# Altium PCB TSI_SAMP_SAMI_V3.4.PcbDoc (part 5 of 5)
Units mm, origin at the board's own origin, x right, y up, seen from the top; angles counter-clockwise.
Board outline 189 x 127.41 mm, 4 copper layers (Top Layer, GROUND, POWER, Bottom Layer), stack 1.56 mm thick; 227 components, 161 nets, 868 pads, 584 vias.
Unrouted connection lines stored in the file: 18.
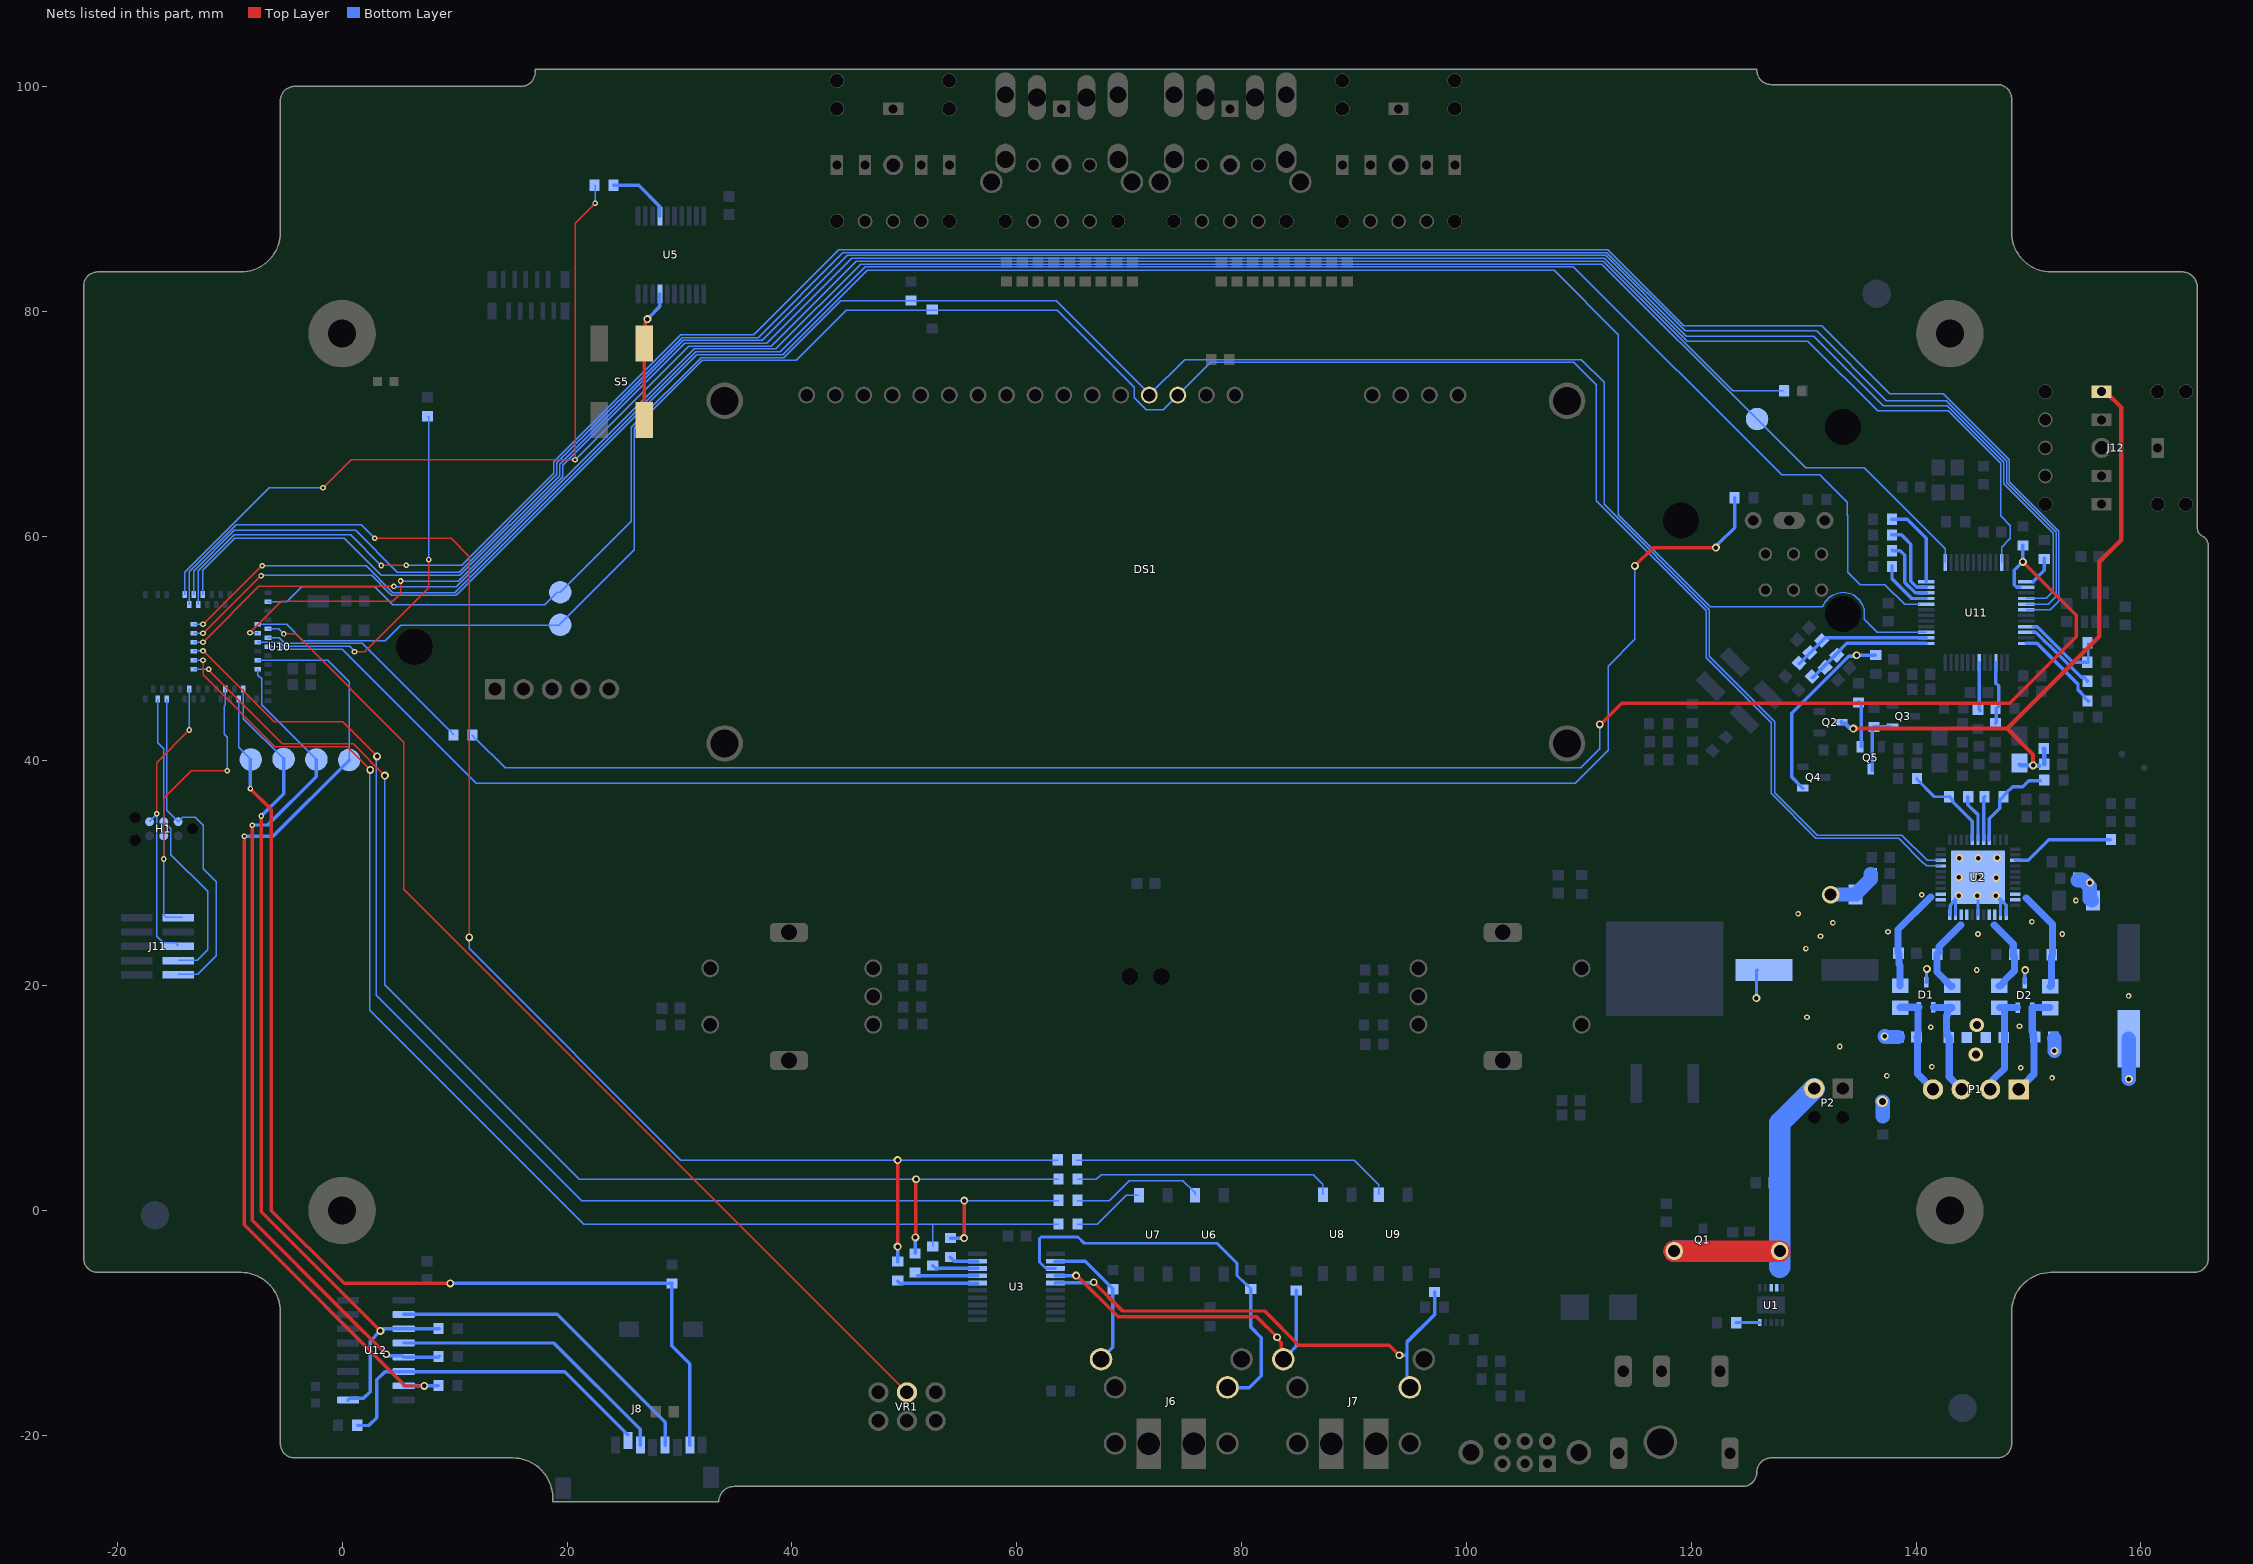
[diagram p5: the nets of this part, all layers, seen from the top]

## Via types
v1: diameter 0.5, hole 0.25, Top Layer to Bottom Layer, tented both sides, 372 vias
v2: diameter 0.7, hole 0.4, Top Layer to Bottom Layer, tented both sides, 201 vias
v3: diameter 1.575, hole 1.067, Top Layer to Bottom Layer, tented both sides, 4 vias
v4: diameter 1.27, hole 0.711, Top Layer to Bottom Layer, tented both sides, 3 vias
v5: diameter 1.016, hole 0.635, Top Layer to Bottom Layer, tented both sides, 2 vias
v6: diameter 0.762, hole 0.381, Top Layer to Bottom Layer, tented both sides, 1 vias
v7: diameter 0.7/0.7 (per signal layer), hole 0.4, Top Layer to Bottom Layer, tented both sides, 1 vias

## Nets (pads, with @x,y where several pads share a name; then routed paths per layer and width w, separated by ;. In a path a pad name is that pad's centre, name@x,y a point inside that pad or via, vN(x,y) a via of type N, cw(c..) or ccw(c..) an arc to the next point about the centre after c; other vN are vias at no path point) (continued)
NetQ3_1: Q3.1 Q5.3 R61.1 | length 5.4
  Bottom Layer w0.305: Q5.3@136.08,39.131 136.08,42.872 136.245,43.037 136.25,43.032 137.706,43.032 Q3.1@137.712,43.027
NetQ4_1: Q4.1 R64.1 | length 16.6
  Bottom Layer w0.305: Q4.1@129.911,37.582 128.93,38.565 128.93,44.255 134,49.325 134.624,49.325 v2(134.7,49.4) ; v2@134.697,49.398 134.703,49.392 R64.1@136.365,49.392
NetQ5_1: Q5.1 R66.1 | length 4.1
  Bottom Layer w0.305: R66.1@134.886,45.247 135.118,45.015 Q5.1@135.118,41.259
NetR4_1: R4.1 U2.25 | length 9.2
  Bottom Layer w0.305: U2.25@148.829,31.151 149.964,31.151 151.804,32.991 R4.1@157.289,32.991
NetR5_1: R5.1 R9.2 U2.19 | length 8.3
  Bottom Layer w0.305: U2.19@146.504,32.976 146.504,34.842 147.441,35.779 147.441,36.516 148.074,37.149 148.074,37.199 148.578,37.703 149.492,37.703 150.034,38.245 R9.2@151.041,38.245
NetR5_2: R5.2 U2.18 | length 3.9
  Bottom Layer w0.305: U2.18@146.004,32.976 146.006,32.978 146.006,36.707 R5.2@146.113,36.814
NetR6_1: R6.1 R10.2 U2.16 | length 8.3
  Bottom Layer w0.254: R10.2@140.055,38.427 140.055,38.377 141.618,36.814 R6.1@142.976,36.814
  Bottom Layer w0.305: R6.1@142.976,36.814 143.274,36.516 143.274,36.376 145.004,34.647 U2.16@145.004,32.976
NetR6_2: R6.2 U2.17 | length 4.2
  Bottom Layer w0.305: R6.2@144.602,36.814 144.602,36.116 145.504,35.214 U2.17@145.504,32.976
NetR7_1: R7.1 U1.10 | length 2.1
  Bottom Layer w0.254: R7.1@123.963,-9.975 123.988,-9.95 U1.10@126.079,-9.95
NetR22_1: R22.1 U6.1 | length 11.9
  Bottom Layer w0.127: R22.1@65.379,0.89 65.396,0.873 68.25,0.873 70.028,2.651 74.788,2.651 75.874,1.565 U6.1@75.874,1.365
NetR23_1: R23.1 U7.1 | length 6.6
  Bottom Layer w0.127: R23.1@65.379,-1.21 67.17,-1.21 69.745,1.365 U7.1@70.874,1.365
NetR24_1: R24.1 U8.1 | length 23.3
  Bottom Layer w0.127: R24.1@65.379,2.79 65.393,2.803 67.094,2.803 67.5,3.21 86.391,3.21 87.236,2.364 U8.1@87.236,1.399
NetR25_1: R25.1 U9.1 | length 28.7
  Bottom Layer w0.127: R25.1@65.316,4.492 90.008,4.492 92.206,2.294 U9.1@92.206,1.399
NetR27_1: R27.1 U5.14 | length 5.7
  Bottom Layer w0.305: R27.1@24.15,91.2 26.376,91.2 28.266,89.31 U5.14@28.266,88.46
NetR39_1: R39.1 U11.9 | length 4.9
  Bottom Layer w0.305: R39.1@137.853,57.35 137.853,56.212 139.618,54.447 U11.9@140.901,54.447
NetR40_1: R40.1 U11.10 | length 6
  Bottom Layer w0.305: R40.1@137.87,58.747 137.915,58.701 138.599,58.701 139,58.3 139,55.87 139.921,54.949 140.899,54.949 U11.10@140.901,54.947
NetR41_1: R41.1 U11.11 | length 6.9
  Bottom Layer w0.305: R41.1@137.85,60.1 138.7,60.1 139.1,59.7 139.541,59.259 139.541,55.976 140.068,55.449 140.899,55.449 U11.11@140.901,55.447
NetR42_1: R42.1 U11.12 | length 7.6
  Bottom Layer w0.305: R42.1@137.85,61.5 139.2,61.5 140.901,59.799 U11.12@140.901,55.947
NetR52_2: R52.2 U11.34 | length 6.7
  Bottom Layer w0.305: U11.34@150.399,51.444 150.65,51.444 152.805,49.289 152.811,49.289 154.677,47.423 154.935,47.423 155.233,47.125 R52.2@155.233,47.075
NetR53_2: R53.2 U11.36 | length 8
  Bottom Layer w0.305: U11.36@149.801,50.447 150.753,50.447 154.4,46.8 154.4,46.319 154.96,45.758 154.96,45.67 155.308,45.323 R53.2@155.346,45.323
NetR54_2: R54.2 R65.1 U11.33 | length 7.9
  Bottom Layer w0.254: R54.2@155.314,48.777 155.314,50.402 R65.1@155.321,50.41
  Bottom Layer w0.305: U11.33@150.399,51.944 150.761,51.944 152.984,49.721 152.99,49.721 153.934,48.777 R54.2@155.314,48.777
NetR55_2: R55.2 U11.25 | length 2.5
  Bottom Layer w0.305: U11.25@150.399,55.949 150.671,56.222 150.671,56.237 151.393,56.958 R55.2@151.393,58.042
NetR57_1: R57.1 U11.42 | length 4.3
  Bottom Layer w0.305: U11.42@145.601,48.747 145.601,44.577 R57.1@145.72,44.459
NetR67_1: R67.1 U3.19 | length 2.6
  Bottom Layer w0.305: R67.1@54.102,-4.139 54.102,-4.15 54.45,-4.498 U3.19@56.522,-4.498
NetR68_1: R68.1 U3.18 | length 4.1
  Bottom Layer w0.305: R68.1@52.54,-4.889 52.799,-5.148 U3.18@56.522,-5.148
NetR69_1: R69.1 U3.17 | length 5.3
  Bottom Layer w0.305: R69.1@51.184,-5.798 U3.17@56.522,-5.798
NetR70_1: R70.1 U3.16 | length 7.2
  Bottom Layer w0.305: R70.1@49.428,-6.285 49.591,-6.448 U3.16@56.522,-6.448
NetR72_1: R72.1 R74.1 U11.26 | length 163
  Top Layer w0.305: v2@111.9,43.231 113.8,45.131 148.331,45.131 154.254,51.054 154.254,52.946 v2(149.5,57.7)
  Bottom Layer w0.127: R72.1@11.557,42.313 11.557,42.263 11.854,41.965 11.904,41.965 14.487,39.383 110.185,39.383 111.861,41.059 v2(111.861,43.241)
  Bottom Layer w0.305: U11.26@149.204,55.449 148.968,55.449 148.746,55.67 148.746,56.946 v2(149.5,57.7) 149.5,59.194 R74.1@149.501,59.195
OUTL+: C8.1 FB2.2 U2.2 U2.3 | length 9.2
  Bottom Layer w0.635: FB2.2@138.582,19.984 FB2.2@138.582,20.014 138.582,21.802 138.486,21.899 138.486,22.809 138.396,22.899 138.396,24.996 141.3,27.9
OUTL-: C7.1 FB1.2 U2.41 U2.42 | length 6.9
  Bottom Layer w0.635: FB1.2@143.205,19.958 143.105,19.958 141.85,21.213 141.85,22.793 141.859,22.793 142.042,22.975 142.042,23.467 143.975,25.4
OUTR+: C5.2 FB4.2 U2.31 U2.32 | length 8.9
  Bottom Layer w0.635: 149.8,27.8 152.136,25.464 152.136,22.76 152.033,22.657 152.033,20.025 FB4.2@151.93,19.923
OUTR-: C6.2 FB3.2 U2.36 U2.37 | length 6.8
  Bottom Layer w0.635: 146.95,25.4 148.2,24.15 148.636,23.714 148.636,22.691 148.742,22.585 148.742,21.337 147.814,20.408 147.814,20.318 147.486,19.991 FB3.2@147.396,19.991
PGND: C1.1 C2.2 C3.1 C4.2 C13.1 C14.1 C16.1 C17.1 C19.2 C22.2 D1.3 D2.3 F3.1 U2.0 U2.34 U2.35 U2.39 U2.43 U2.44 | length 28.2
  Bottom Layer w0.305: v2(125.8,18.9) 125.8,21.325 C22.2@125.875,21.4 ; D1.3@140.893,20.299 140.925,20.331 140.925,21.466 v2(140.957,21.498) ; U2.44@143.004,26.326 143.027,26.349 143.027,27.174 U2.0@143.504,27.651 ; U2.43@143.504,26.326 U2.0@143.504,27.651 ; v2(143.789,28.025) 143.504,27.74 U2.0@143.504,27.651 ; v2(145.44,28.013) 145.504,27.949 U2.39@145.504,26.326 ; U2.35@147.504,26.326 147.504,27.626 v2(147.104,28.025) 147.129,28.025 148.004,27.151 U2.34@148.004,26.326 ; D2.3@149.682,20.251 149.682,21.157 149.682,21.36 v2(149.708,21.386)
  Bottom Layer w1.27: v3(132.4,28.1) 132.413,28.113 134.692,28.113 C17.1@134.706,28.127 ; C17.1@134.706,28.227 135.967,29.488 C13.1@135.967,29.905 ; v5(137,9.7) 137.024,9.676 F3.1@137.024,8.391 ; v2(137.2,15.5) 137.26,15.44 C4.2@138.392,15.44 ; C1.1@152.296,15.276 152.3,15.273 v2(152.3,14.2) ; C14.1@154.38,29.384 154.872,29.384 155.451,28.805 155.451,27.746 C16.1@155.616,27.581 ; C19.2@158.9,15.275 158.925,15.25 v2(158.925,11.7)
  other v1: 152.1,11.8 137.4,12 149.3,12.7 141.4,12.8 133.2,14.6 141.3,16.3 149.2,16.4 130.3,17.2 158.9,19.1 145.4,21.4 130.2,23.3 131.5,24.4 145.5,24.6 153,24.6 137.5,24.8 132.6,25.6 150.3,25.7 129.5,26.4 154.216,27.581 140.5,28.1
  other v2: 155.46,29.168 147.129,29.587 143.802,29.638 145.504,29.651 143.853,31.353 145.529,31.353 147.205,31.365
  other v4: 145.313,13.879 145.4,16.5
PWR_LED: R14.2 U10.23 | length 33.2
  Top Layer w0.127: v1(1.1,49.7) 2,49.7 7.7,55.4 v1(7.7,57.9)
  Bottom Layer w0.127: U10.23@-7.5,50.55 -5.563,50.55 -5.205,50.192 0.657,50.192 1.1,49.749 v1(1.1,49.7) ; R14.2@7.6,70.65 7.7,70.55 v1(7.7,57.9)
R_LED_DOME: R73.1 U10.24 | length 155.9
  Top Layer w0.305: v2(114.985,57.349) 116.606,58.971 v2(122.2,58.971)
  Bottom Layer w0.127: U10.24@-6.6,50.15 -5.522,50.15 -5.31,49.938 -0.013,49.938 11.925,38 109.695,38 112.623,40.929 112.623,48.436 114.985,50.797 v2(114.985,57.349)
  Bottom Layer w0.305: v2(122.2,58.971) 122.2,59.078 122.398,59.275 122.398,59.298 123.85,60.75 R73.1@123.85,63.4
REC_LED: R15.2 R27.2 U10.4 | length 185.6
  Top Layer w0.127: v1(-1.7,64.3) 0.789,66.789 v1(20.711,66.789) ; v1@20.723,66.789 20.723,87.823 v1(22.5,89.6)
  Bottom Layer w0.127: U10.4@-14,54.8 -14,56.796 -6.496,64.3 v1(-1.7,64.3) ; v1(20.711,66.789) 30.819,76.897 38.169,76.897 45.723,84.451 112.164,84.451 123.695,72.92 R15.2@128.195,72.92 ; R27.2@22.45,91.2 22.5,91.15 v1(22.5,89.6)
RESET: H1.3 J11.10 U10.40 | length 28.3
  Top Layer w0.127: v1(-15.873,31.275) -15.875,31.277 -15.875,36.675 -13.425,39.125 v1(-10.225,39.125)
  Bottom Layer w0.127: v1(-15.873,31.275) -15.867,31.283 -15.867,33.316 H1.3@-15.86,33.324 ; v1(-15.873,31.275) -15.875,31.273 -15.875,26.306 -15.665,26.096 J11.10@-14.175,26.096 ; U10.40@-10.4,46.4 -10.4,44.969 -10.481,44.888 -10.481,42.365 -10.225,42.109 v1(-10.225,39.125)
RIGHT: R13.1 R63.2 U11.39 | length 5.4
  Bottom Layer w0.305: R63.2@147.066,43.329 147.117,43.38 R13.1@147.117,44.688 ; U11.39@147.101,48.747 147.101,46.913 147.341,46.673 R13.1@147.341,44.84
RIGHT_S: C32.2 C65.1 J12.3 Q2.3 R37.1 | length 57.6
  Top Layer w0.381: v2(134.425,42.875) 148.1,42.875 ; v2(150.4,39.6) 150.4,40.575 148.1,42.875 ; J12.3@156.493,72.84 156.843,72.84 158.255,71.428 158.255,59.674 156.291,57.711 156.291,51.066 148.1,42.875
  Bottom Layer w0.381: Q2.3@133.36,43.434 133.469,43.325 133.694,43.325 134.083,42.936 134.364,42.936 v2(134.425,42.875) ; C32.2@149.19,39.682 149.271,39.6 v2(150.4,39.6) ; v2@150.318,39.579 C65.1@150.966,39.579 ; R37.1@151.35,41.1 151.4,41.05 C65.1@151.4,39.7
SAMP_DB_1: J6.2A R16.1 U3.2 | length 13
  Bottom Layer w0.254: U3.2@63.359,-4.581 U3.2@63.442,-4.498
  Bottom Layer w0.305: U3.2@63.442,-4.498 66.102,-4.498 68.554,-6.95 R16.1@68.554,-7 68.554,-12.167 J6.2A@67.499,-13.222
SAMP_DB_2: J6.2B R17.1 U3.3 | length 36.7
  Bottom Layer w0.254: U3.3@63.442,-5.148 62.592,-5.148 62.027,-4.582 62.027,-2.502 62.175,-2.353 65.379,-2.353 65.456,-2.353 66.002,-2.899 77.83,-2.899 79.608,-4.678 79.608,-5.774 80.387,-6.552 80.437,-6.552 80.81,-6.925 R17.1@80.81,-6.975
  Bottom Layer w0.305: J6.2B@78.749,-15.722 78.778,-15.752 80.683,-15.752 81.762,-14.672 81.762,-11.307 80.81,-10.354 R17.1@80.81,-6.975
SAMP_DB_3: J7.2A R18.1 U3.4 | length 30.8
  Top Layer w0.305: v2(65.275,-5.775) 65.352,-5.775 69.014,-9.437 81.328,-9.437 v2(83.159,-11.268) 83.159,-11.375 83.549,-11.765 83.549,-13.055 J7.2A@83.717,-13.222
  Bottom Layer w0.305: U3.4@63.442,-5.798 63.453,-5.786 65.264,-5.786 v2(65.275,-5.775) ; J7.2A@83.717,-13.222 84.861,-12.078 R18.1@84.861,-7.065
SAMP_DB_4: J7.2B R19.1 U3.5 | length 43.6
  Top Layer w0.305: v2(66.85,-6.375) 69.407,-8.932 82.054,-8.932 85.09,-11.967 93.14,-11.967 v2(94.042,-12.869)
  Bottom Layer w0.305: U3.5@63.442,-6.448 63.478,-6.411 66.814,-6.411 v2(66.85,-6.375) ; v2(94.042,-12.869) 94.71,-12.869 94.716,-12.875 ; J7.2B@94.967,-15.722 94.716,-15.472 94.716,-12.875 ; R19.1@97.167,-7.217 97.167,-9.24 94.716,-11.691 94.716,-12.875
SCL: DS1.8 R20.2 T7.1 U2.9 U10.16 | length 201.9
  Bottom Layer w0.127: U10.16@-6.6,54.15 -4.95,54.15 -3.6,55.5 2.9,55.5 4.501,53.899 18.008,53.899 19.11,55 T7.1@19.4,55 25.73,61.33 25.73,69.677 31.933,75.881 39.29,75.881 44.359,80.95 R20.2@50.6,80.95 63.496,80.95 DS1.8@71.85,72.596 ; DS1.8@71.793,72.539 DS1.8@71.85,72.596 ; U2.9@142.179,31.151 140.985,31.151 138.736,33.4 131.2,33.4 127.419,37.181 127.419,43.481 121.6,49.3 121.6,53.459 112.242,62.817 112.242,73.681 110.223,75.7 74.954,75.7 DS1.8@71.85,72.596
SD_CLK: J8.5 U12.2 | length 29.3
  Bottom Layer w0.305: U12.2@5.472,-9.236 19.136,-9.236 28.725,-18.825 J8.5@28.725,-20.863
SD_CS: J8.2 R58.2 U12.6 | length 30.3
  Bottom Layer w0.305: R58.2@1.397,-19.092 1.422,-19.117 2.375,-19.117 3.073,-18.419 3.073,-15.053 3.81,-14.316 U12.6@5.472,-14.316 19.79,-14.316 25.177,-19.704 J8.2@25.425,-19.951
SD_MOSI: J8.3 U12.4 | length 25.6
  Bottom Layer w0.305: U12.4@5.472,-11.776 18.838,-11.776 26.525,-19.464 J8.3@26.525,-20.863
SDA: DS1.7 R21.2 T8.1 U2.8 U10.19 | length 205.5
  Bottom Layer w0.127: U10.19@-7.5,52.15 -4.95,52.15 -3.5,50.7 3.825,50.7 5.2,52.075 19.275,52.075 25.984,58.784 25.984,69.572 32.039,75.627 40.386,75.627 44.86,80.1 63.6,80.1 70.475,73.225 70.475,72.3 71.525,71.25 73.044,71.25 77.24,75.446 109.551,75.446 111.557,73.441 111.557,63.143 121.346,53.354 121.346,49.154 127.1,43.4 127.1,37.1 131.064,33.136 138.436,33.136 140.612,30.961 140.619,30.961 140.928,30.651 U2.8@142.179,30.651
SDC_SPI_MCS: R43.2 T10.1 U10.27 U12.7 | length 87.7
  Top Layer w0.305: v1(-8.7,33.3) -8.718,33.282 -8.718,-1.266 5.615,-15.6 v2(7.3,-15.6)
  Bottom Layer w0.127: U10.27@-7.5,48.95 -1.275,48.95 0.625,47.05 T10.1@0.625,40.075
  Bottom Layer w0.305: v1(-8.7,33.3) -6.15,33.3 T10.1@0.625,40.075 ; U12.7@5.472,-15.586 5.479,-15.593 7.293,-15.593 v2(7.3,-15.6) ; v2@7.286,-15.586 R43.2@8.56,-15.586
SDC_SPI_MISO: J8.7 R49.2 T13.1 U10.37 | length 100.1
  Top Layer w0.305: v1(-8.163,37.537) -6.3,35.675 -6.3,0 0.181,-6.481 v2(9.614,-6.481)
  Bottom Layer w0.127: U10.37@-9.2,45.5 -9.2,41.2 T13.1@-8.125,40.125
  Bottom Layer w0.305: v1(-8.163,37.537) -8.163,40.087 T13.1@-8.125,40.125 ; v2(9.614,-6.481) 9.626,-6.468 R49.2@29.337,-6.468 ; R49.2@29.349,-6.455 R49.2@29.337,-6.468 ; J8.7@30.925,-20.863 30.925,-13.628 29.324,-12.027 29.324,-6.481 R49.2@29.337,-6.468
SDC_SPI_MOSI: R48.2 T11.1 U10.29 U12.5 | length 76
  Top Layer w0.305: v1(-8,34.279) -8,-0.861 0.252,-9.114 v2(3.918,-12.78)
  Bottom Layer w0.127: U10.29@-7.5,48.15 -7.5,47.632 -7.163,47.295 -7.163,44.996 T11.1@-2.292,40.125
  Bottom Layer w0.305: v1(-8,34.279) -7.984,34.294 -6.606,34.294 -2.292,38.608 T11.1@-2.292,40.125 ; v2(3.918,-12.78) 4.025,-12.78 4.144,-12.899 5.324,-12.899 U12.5@5.472,-13.046 8.547,-13.046 R48.2@8.623,-12.97
SDC_SPI_SCK: R50.2 T12.1 U10.36 U12.3 U12.9 | length 77.2
  Top Layer w0.305: v1(-7.2,35.1) -7.2,-0.1 v2(3.4,-10.7)
  Bottom Layer w0.127: U10.36@-8.8,46.4 -8.8,43.768 T12.1@-5.208,40.176
  Bottom Layer w0.305: v1(-7.2,35.1) -5.208,37.092 T12.1@-5.208,40.176 ; U12.9@0.522,-16.856 0.669,-16.709 1.9,-16.709 2.489,-16.12 2.489,-11.611 v2(3.4,-10.7) 3.507,-10.7 3.7,-10.506 U12.3@5.472,-10.506 8.61,-10.506 R50.2@8.623,-10.494
"SPEAKER_LEFT +": C4.1 D1.2 FB2.1 P1.4 | length 9.6
  Bottom Layer w0.635: FB2.1@138.582,18.084 138.59,18.091 140.236,18.091 D1.2@140.243,18.099 140.168,18.023 140.168,15.515 140.092,15.44 140.112,15.42 140.112,12.17 P1.4@141.503,10.779
"SPEAKER_LEFT -": C3.2 D1.1 FB1.1 P1.3 | length 11.2
  Bottom Layer w0.635: D1.1@141.543,18.059 D1.1@141.543,18.099 141.579,18.064 142.915,18.064 FB1.1@142.95,18.099 ; D1.1@141.564,18.079 143.185,18.079 FB1.1@143.205,18.058 ; C3.2@142.95,15.375 142.95,11.872 P1.3@144.043,10.779 ; C3.2@142.95,15.4 142.792,15.557 142.792,15.862 142.7,15.954 142.7,17.329 142.787,17.416 142.787,17.701 143.115,18.028 FB1.1@143.205,18.028
"SPEAKER_RIGHT +": C1.2 D2.1 FB4.1 P1.1 | length 9.5
  Bottom Layer w0.635: P1.1@149.123,10.779 149.706,11.361 150.471,12.127 150.471,15.382 150.414,15.44 150.414,15.862 150.332,15.944 D2.1@150.332,18.051 FB4.1@151.902,18.051
"SPEAKER_RIGHT -": C2.1 D2.2 FB3.1 P1.2 | length 9.4
  Bottom Layer w0.635: P1.2@146.583,10.779 146.806,11.002 146.806,11.606 147.85,12.65 147.85,15.4 FB3.1@147.85,18.056 ; FB3.1@147.401,18.056 FB3.1@148.008,18.056 ; FB3.1@148.008,18.051 D2.2@149.032,18.051
SWCLK: H1.4 J11.4 U10.53 | length 27.1
  Bottom Layer w0.127: U10.53@-16.4,45.5 -16.4,41.625 -15.86,41.085 H1.4@-15.86,34.594 -15.225,33.959 -15.225,31.65 -11.975,28.4 -11.975,23.2 -12.889,22.286 J11.4@-14.575,22.286
SWDIO: H1.2 J11.2 U10.51 | length 30.1
  Bottom Layer w0.127: U10.51@-15.6,45.5 -15.6,35.604 H1.2@-14.59,34.594 -14.581,34.594 -14.2,34.975 -13.075,34.975 -12.375,34.275 -12.375,30.405 -11.199,29.229 -11.199,22.66 -12.839,21.02 J11.2@-14.575,21.02
SWO: H1.6 J11.6 U10.47 | length 26.4
  Top Layer w0.127: v1(-16.5,35.3) -16.5,39.85 v1(-13.6,42.75)
  Bottom Layer w0.127: H1.6@-17.13,34.594 -17.13,34.632 -16.538,35.224 v1@-16.5,35.224 ; v1(-16.5,35.3) v1@-16.5,35.224 ; J11.6@-14.575,23.56 -14.837,23.822 -15.922,23.822 -16.5,24.4 v1@-16.5,35.224 ; v1(-13.6,42.75) U10.47@-13.6,46.4
TRIG_1: R22.2 R67.2 U10.59 | length 114.3
  Top Layer w0.127: v1(-12.375,49.785) -6.05,43.46 0.04,43.46 v2(3.1,40.4)
  Top Layer w0.305: v2(55.325,-2.45) 55.328,-2.447 55.328,0.887 v2(55.33,0.89)
  Bottom Layer w0.127: U10.59@-13.2,49.75 -13.165,49.785 v1(-12.375,49.785) ; v2(3.1,40.4) 3.041,40.341 3.041,19.159 21.31,0.89 v2(55.33,0.89) R22.2@63.754,0.89
  Bottom Layer w0.305: R67.2@54.102,-2.439 54.113,-2.45 v2(55.325,-2.45)
TRIG_2: R23.2 R68.2 U10.60 | length 113.1
  Top Layer w0.127: v1(-12.375,48.95) -12.375,47.657 -5.98,41.262 0.438,41.262 v2(2.5,39.2)
  Bottom Layer w0.127: U10.60@-13.2,48.95 v1(-12.375,48.95) ; v2(2.5,39.2) 2.475,39.175 2.475,17.825 21.51,-1.21 52.47,-1.21 ; R68.2@52.54,-3.189 52.54,-1.28 52.47,-1.21 ; R23.2@63.754,-1.21 52.47,-1.21
TRIG_3: R24.2 R69.2 U10.61 | length 113.3
  Top Layer w0.127: v1(-11.875,48.15) -11.875,48.065 -5.326,41.516 0.984,41.516 v2(3.8,38.7)
  Top Layer w0.305: v2(50.99,-2.388) 51.018,-2.36 51.018,2.762 v2(51.046,2.79)
  Bottom Layer w0.127: U10.61@-13.2,48.15 v1(-11.875,48.15) ; v2(3.8,38.7) 3.8,20.1 21.11,2.79 v2(51.046,2.79) R24.2@63.754,2.79
  Bottom Layer w0.305: R69.2@50.952,-3.811 50.99,-3.773 v2(50.99,-2.388)
TRIG_4: R25.2 R70.2 U10.5 | length 134.9
  Top Layer w0.127: v1(2.9,59.796) 2.904,59.8 9.7,59.8 11.325,58.175 11.325,24.325 v2(11.3,24.3)
  Top Layer w0.305: v2(49.403,-3.2) v2(49.403,-3.2) 49.404,4.491 v2(49.405,4.492)
  Bottom Layer w0.127: U10.5@-13.6,53.9 -13.6,56.837 -9.437,61 1.7,61 2.9,59.8 v1(2.9,59.796) ; v2(11.3,24.3) 11.3,23.318 30.126,4.492 v2(49.405,4.492) R25.2@63.69,4.492
  Bottom Layer w0.305: v2(49.403,-3.2) 49.403,-4.509 R70.2@49.428,-4.535
"UI LOCK": S5.1 U5.7 | length 11.6
  Top Layer w0.305: S5.1@26.877,70.541 26.877,76.941 26.945,77.01 26.945,78.987 27.153,79.194 v2(27.153,79.301)
  Bottom Layer w0.305: v2(27.153,79.301) 28.266,80.414 U5.7@28.266,81.54
V_CTRL: U10.20 VR1.2 | length 92.6
  Top Layer w0.127: v1(-5.2,51.3) -4.15,51.3 5.5,41.65 5.5,28.57 VR1.2@50.241,-16.171
  Bottom Layer w0.127: U10.20@-6.6,51.75 -6.59,51.74 -5.64,51.74 v1(-5.2,51.3)
VBAT: C30.2 P2.2 Q1.2 U1.3 U1.4 | length 28.2
  Top Layer w1.905: v3(118.479,-3.6) v3(127.879,-3.6)
  Bottom Layer w1.905: v3(118.479,-3.6) Q1.2@120.079,-3.6 ; 127.879,-5.049 127.879,2.475 127.879,7.798 P2.2@130.937,10.855
VS_MICN: C50.2 C51.2 R51.1 U11.2 | length 12.2
  Bottom Layer w0.305: R51.1@129.608,48.639 C51.2@130.622,49.653 ; C51.2@130.622,49.654 131.646,50.678 131.915,50.947 U11.2@140.901,50.947
VS_MICP: C47.2 C52.2 R56.1 U11.1 | length 11.4
  Bottom Layer w0.305: R56.1@130.749,47.444 130.84,47.444 131.809,48.414 132.872,49.477 133.842,50.447 U11.1@140.901,50.447
VS_RX: R72.2 U10.22 | length 20.1
  Bottom Layer w0.127: U10.22@-6.6,50.95 -5.603,50.95 -5.099,50.446 1.798,50.446 9.495,42.749 9.507,42.749 9.931,42.326 R72.2@9.931,42.313
VS_SPI_DCS: T4.1 U10.58 U11.13 | length 181.5
  Top Layer w0.127: v1(-12.375,50.55) -7.401,55.524 v1@4.595,55.524
  Bottom Layer w0.127: U10.58@-13.2,50.55 v1(-12.375,50.55) ; v1(4.597,55.524) 4.648,55.474 10.155,55.474 31.324,76.643 38.561,76.643 46.116,84.197 112.059,84.197 125.85,70.405 130.167,66.088 135.397,66.088 142.601,58.884 U11.13@142.601,57.647
VS_SPI_DREQ: U10.56 U11.8 | length 184.7
  Top Layer w0.127: v1(-12.375,52.15) -12.345,52.15 -7.142,57.353 v1(-7.112,57.353)
  Bottom Layer w0.127: U10.56@-13.2,52.15 v1(-12.375,52.15) ; v1(-7.112,57.353) 2.124,57.353 4.512,54.966 10.006,54.966 31.429,76.389 38.954,76.389 46.508,83.943 109.524,83.943 128.036,65.43 131.445,65.43 133.858,63.017 133.858,61.836 133.903,61.792 133.903,56.797 134.6,56.1 135.012,55.688 137.23,55.688 138.97,53.947 U11.8@140.304,53.947
VS_SPI_MCS: U10.21 U11.23 | length 188.6
  Top Layer w0.127: v1(-8.2,51.4) -5.422,54.178 4.496,54.178 5.2,54.882 v1(5.2,56)
  Bottom Layer w0.127: v1(-8.2,51.4) -7.55,51.4 U10.21@-7.5,51.35 ; v1(5.2,56) 10.322,56 19.6,65.278 19.6,66.3 30.451,77.151 37.776,77.151 45.331,84.705 112.269,84.705 119.647,77.327 130.378,77.327 136.576,71.129 142.871,71.129 147.538,66.462 147.538,61.789 148.391,60.936 148.391,59.783 148.213,59.605 147.601,58.993 U11.23@147.601,57.647
VS_SPI_MISO: U10.7 U11.30 | length 204.2
  Top Layer w0.127: v1(3.48,57.379) 3.49,57.389 5.689,57.389 v1(5.7,57.4)
  Bottom Layer w0.127: U10.7@-12.8,53.9 -12.8,56.918 -9.618,60.1 0.758,60.1 v1(3.48,57.379) ; v1(5.7,57.4) 10.645,57.4 18.838,65.593 18.838,66.616 30.135,77.913 36.598,77.913 44.153,85.467 112.585,85.467 119.353,78.698 131.623,78.698 137.668,72.653 142.425,72.653 148.3,66.778 148.3,64.844 152.709,60.435 152.709,54.205 151.951,53.447 U11.30@149.801,53.447
VS_SPI_MOSI: U10.6 U11.29 | length 203.2
  Bottom Layer w0.127: U10.6@-13.2,54.8 -13.2,56.878 -9.578,60.5 1.2,60.5 4.9,56.8 10.404,56.8 19.092,65.488 19.092,66.51 30.24,77.659 36.991,77.659 44.545,85.213 112.48,85.213 119.451,78.241 131.153,78.241 137.35,72.044 142.675,72.044 148.046,66.672 148.046,64.739 152.455,60.329 152.455,54.659 151.743,53.947 U11.29@149.801,53.947
VS_SPI_SCK: U10.8 U11.28 | length 200.9
  Bottom Layer w0.127: U10.8@-12.4,54.8 -12.4,56.959 -9.559,59.8 0.2,59.8 3.484,56.516 10.479,56.516 19.346,65.383 19.346,66.405 30.345,77.405 37.383,77.405 44.938,84.959 112.374,84.959 119.549,77.784 130.873,77.784 137.071,71.586 142.773,71.586 147.792,66.567 147.792,64.634 152.197,60.228 152.197,55.072 151.574,54.449 149.804,54.449 U11.28@149.801,54.447
VS_SPI_xRESET: U10.57 U11.3 | length 193.3
  Top Layer w0.127: v1(-12.375,51.35) -12.351,51.35 -7.237,56.464 v1(-7.214,56.464)
  Bottom Layer w0.127: U10.57@-13.2,51.35 v1(-12.375,51.35) ; v1(-7.214,56.464) -7.178,56.5 2.618,56.5 4.153,54.966 4.407,54.712 10.112,54.712 10.366,54.966 31.535,76.135 39.185,76.135 46.7,83.65 107.799,83.65 113.525,77.924 113.525,61.893 121.71,53.708 131.502,53.708 131.527,53.708 131.552,53.713 ccw(c131.502,54.013) 131.777,53.883 cw(c133.502,53.074) 135.381,52.761 135.381,52.736 135.381,52.61 136.544,51.447 U11.3@140.901,51.447
pads on no net: DS1.0 DS1.1 DS1.2 DS1.4 DS1.9 DS1.10 DS1.11 DS1.12 DS1.13 DS1.14 DS1.15 DS1.16 DS1.17 DS1.18 DS1.19 DS1.20 H1. J1.0 J1.3 J2.0 J2.4 J2.5 J2.6 J2.10 J2.11 J3.0 J3.4 J3.5 J3.6 J3.10 J3.11 J4.0 J4.4 J4.5 J4.6 J4.10 J4.11 J5.0 J5.4 J5.5 J5.6 J5.10 J5.11 J6.0 J7.0 J8.1 J8.8 J8.CD1 J8.CD2 J9.MP1 J9.MP2 J9.MP3 J9.MP4 J11.7 J11.8 J11.9 J12.0 J12.6 J12.10 J12.11 M1. P2.0 S1.1 S1.2 S1.3 S1.4 S1.7 S1.8 S2.1 S2.4 S2.5 S2.6 S3.0 S4.0 U1.5 U1.6 U1.7 U2.23 U2.26 U3.8 U3.9 U3.11 U3.12 U3.13 U5.8 U5.9 U5.11 U5.12 U5.13 U10.0 U10.31 U10.32 U10.34 U10.35 U11.15 U11.27 U12.12 U12.13 U12.15 U12.16 VR1.4 VR1.5 VR1.6

## Polygon pours and split planes (outlines as drawn)
GND on Bottom Layer "GND_L04_P011" (solid, remove dead copper, pour order 11): -21.731,-5.75 -9,-5.75 cw(c-9,-9) -5.75,-8.998 -5.75,-20.73 ccw(c-4.23,-20.73) -4.23,-22.25 15.4,-22.25 cw(c15.4,-25.406) 18.555,-25.406 18.555,-26.187 33.767,-26.187 cw(c35.164,-26.187) 35.164,-24.79 36.71,-24.79 124.561,-24.79 ccw(c124.561,-23.27) 126.082,-23.27 cw(c127.1,-23.269) 127.099,-22.25 147.23,-22.25 ccw(c147.23,-20.73) 148.75,-20.73 148.75,-9 cw(c152,-9) 152,-5.75 164.73,-5.75 ccw(c164.73,-4.23) 166.25,-4.23 166.25,58.271 ccw(c164.025,58.273) 165.446,59.986 cw(c165.809,60.424) 165.24,60.42 165.136,83.75 152,83.75 cw(c152,87) 148.75,87 148.75,98.891 ccw(c147.231,98.892) 147.23,100.412 127.101,100.412 cw(c127.101,101.431) 126.082,101.431 126.08,101.457 126.08,101.75 ccw(c125.831,101.751) 125.83,102 17.17,102 ccw(c17.169,101.751) 16.92,101.743 16.92,101.27 cw(c15.9,101.27) 15.9,100.25 -4.23,100.25 ccw(c-4.231,98.731) -5.75,98.73 -5.75,87 cw(c-8.999,86.999) -9,83.75 -21.73,83.75 ccw(c-21.731,82.231) -23.25,82.23 -23.25,-4.23 ccw(c-21.731,-4.231)
PGND on Bottom Layer "PGND_L04_P010" (solid, pour order 10): 147.894,32.041 148.021,29.805 149.304,29.805 152.333,30.054 154.883,30.054 161.8,26 161.8,10.958 153.958,10.958 151.1,8.1 135.8,8.1 135.8,10.6 127.6,18.8 123.9,18.8 123.9,24.3 130.252,30.652 143.114,30.652 143.114,32.041
GND on Top Layer "GND_L01_P008" (solid, remove dead copper, pour order 8): -21.73,-5.5 -9,-5.5 cw(c-9,-9) -5.5,-9 -5.5,-20.73 ccw(c-4.23,-20.73) -4.23,-22 14.648,-22 15.168,-22 cw(c15.168,-25.557) 18.725,-25.557 18.725,-25.913 33.493,-25.913 cw(c34.866,-25.913) 34.867,-24.54 35.201,-24.54 36.496,-24.54 37.516,-24.54 124.561,-24.54 ccw(c124.561,-23.27) 125.831,-23.27 cw(c127.1,-23.269) 127.1,-22 147.23,-22 ccw(c147.23,-20.73) 148.5,-20.73 148.5,-9 cw(c152,-9) 152,-5.5 164.73,-5.5 ccw(c164.73,-4.23) 166,-4.23 166,59.115 ccw(c165.204,59.209) 165.717,59.825 165.37,60.053 cw(c165.806,60.719) 165.009,60.709 165.019,82.23 ccw(c163.687,82.168) 163.624,83.5 152,83.5 cw(c152,87) 148.5,87 148.5,98.891 ccw(c147.23,98.892) 147.23,100.161 127.101,100.161 cw(c127.101,101.431) 125.831,101.431 ccw(c124.642,101.351) 124.561,102.54 18.44,102.54 ccw(c18.439,101.271) 17.17,101.27 cw(c15.901,101.269) 15.9,100 -4.23,100 ccw(c-4.231,98.731) -5.5,98.73 -5.5,87 cw(c-9,87) -9,83.5 -21.73,83.5 ccw(c-21.731,82.231) -23,82.23 -23,-4.23 ccw(c-21.73,-4.23)
3V3_LDO on POWER (split plane): 534 vertices, not listed, extent -22.49,-25.403 165.49,100.99
AVDD on POWER (split plane): 135.295,51.099 135.337,51.07 135.386,51.061 142.01,51.061 142.021,51.053 142.061,51.046 142.061,50.022 142.071,49.972 142.099,49.93 142.141,49.902 142.19,49.892 152.118,49.892 152.118,39.547 152.118,39.401 152.118,37.616 134.935,37.616 134.885,37.606 134.843,37.578 132.392,35.127 112.753,35.127 112.753,39.379 112.753,46.958 119.066,53.271 133.122,53.271
3V3 on POWER (split plane): 149.514,58.804 149.524,58.754 149.552,58.712 149.594,58.684 149.644,58.674 155.318,58.674 155.318,50.022 155.318,39.53 152.377,39.53 152.377,39.547 152.377,50.022 152.367,50.071 152.339,50.113 152.297,50.141 152.247,50.151 142.32,50.151 142.32,51.173 142.31,51.223 142.282,51.265 142.24,51.293 142.19,51.303 142.148,51.303 142.137,51.31 142.087,51.32 135.44,51.32 133.359,53.401 137.56,57.602 139.56,57.602 139.61,57.612 139.652,57.64 139.68,57.682 139.689,57.731 139.689,67.292 149.514,67.292
GND on GROUND (split plane): 571 vertices, not listed, extent -22.49,-25.403 165.49,100.99
PGND on GROUND (split plane): 147.914,29.41 147.924,29.361 147.952,29.319 147.994,29.291 148.044,29.281 151.828,29.281 151.878,29.291 151.92,29.319 151.948,29.361 151.958,29.41 151.958,30.123 165.49,30.123 165.49,7.759 135.232,7.759 135.232,14.246 135.222,14.295 135.194,14.337 135.152,14.365 135.103,14.375 128.539,14.375 125.229,17.685 125.229,29.37 142.964,29.37 143.013,29.38 143.055,29.408 143.083,29.45 143.093,29.499 143.093,32.061 147.914,32.061
AGND on GROUND (split plane): 158.043,70.958 158.085,70.93 158.134,70.921 162.596,70.921 162.596,65.508 155.629,58.542 155.601,58.5 155.591,58.45 155.591,55.416 155.591,41.623 151.585,37.616 134.935,37.616 134.885,37.606 134.843,37.578 132.392,35.127 112.753,35.127 112.753,39.379 112.753,46.958 118.637,52.842 130.275,52.842 132.908,50.208 132.95,50.18 133,50.171 148.5,50.171 148.55,50.18 148.592,50.208 150.053,51.67 150.081,51.712 150.091,51.761 150.091,72.041 156.96,72.041

## Keep-outs
Keep-Out Layer:
  lines w0.1: 70.102,10.728 ccw(c70.356,10.728) 70.356,10.474 72.646,10.474 ccw(c72.646,10.728) 72.9,10.728 72.9,26.446 ccw(c72.646,26.446) 72.646,26.7 70.356,26.7 ccw(c70.356,26.446) 70.102,26.446 70.102,10.728
  lines w0.254: 125.83,101.5 125.83,101.431 125.831,101.431 ccw(c127.101,101.431) 127.101,100.161 147.23,100.161 cw(c147.23,98.891) 148.5,98.891 148.5,87 ccw(c152,87) 152,83.5 163.624,83.5 163.792,83.5 cw(c163.792,82.23) 165.062,82.23 165.062,75.022 165.062,60.818 165.062,60.795 ccw(c166.112,60.795) 165.37,60.052 165.783,59.639 cw(c165.259,59.115) 166,59.115 166,58.553 ; 125.831,101.5 125.827,101.5 124.561,101.5 18.44,101.5 17.17,101.5 17.17,101.27 cw(c15.9,101.27) 15.9,100 -4.23,100 ccw(c-4.23,98.73) -5.5,98.73 -5.5,87 cw(c-9,87) -9,83.5 -21.73,83.5 ccw(c-21.73,82.23) -23,82.23 -23,-4.23 ccw(c-21.73,-4.23) -21.73,-5.5 -9,-5.5 cw(c-9,-9) -5.5,-9 -5.5,-20.73 ccw(c-4.23,-20.73) -4.23,-22 14.393,-22 15.35,-22 cw(c15.35,-25.319) 18.669,-25.319 18.669,-25.375 18.669,-26.073 33.493,-26.073 33.493,-25.81 cw(c34.763,-25.81) 34.763,-24.54 36.382,-24.54 124.561,-24.54 ccw(c124.561,-23.27) 125.831,-23.27 cw(c127.101,-23.269) 127.1,-22 147.23,-22 ccw(c147.23,-20.73) 148.5,-20.73 148.5,-9 cw(c152,-9) 152,-5.5 164.73,-5.5 ccw(c164.73,-4.23) 166,-4.23 166,58.553 ; 166,58.553 ccw(c166,58.553) 166,58.553
  lines w0.5: 35.216,44.461 ccw(c36.74,44.461) 36.74,42.937 106.26,42.937 ccw(c106.26,44.461) 107.784,44.461 107.784,49.253 112.317,53.218 ccw(c111.314,54.365) 112.838,54.382 112.782,59.262 ccw(c111.258,59.244) 112.261,60.391 107.784,64.307 107.784,69.099 ccw(c106.26,69.099) 106.26,70.623 36.74,70.623 ccw(c36.74,69.099) 35.216,69.099 35.216,44.461

## Other copper
Top Layer:
  pour cut-out: -14.1,45.323 -14.7,45.323 -14.7,45.9 -14.15,45.9 -14.1,45.85
  pour cut-out: -13.5,47.823 -14.1,47.823 -14.1,48.4 -13.55,48.4 -13.5,48.35
  region net 3V3_LDO: 82.9,83.1 80.5,83.1 80.5,81.5 80.9,81.1 82.5,81.1 82.9,81.5
  region net 3V3_LDO: 63.8,83.1 61.4,83.1 61.4,81.5 61.8,81.1 63.4,81.1 63.8,81.5
  region net 3V3_LDO: 76.725,76.2 75.5,74.975 75.5,71.3 77.8,71.3 77.8,76.2
  region net GND: 79.475,76.2 80.9,74.775 80.9,71.3 78.4,71.3 78.4,76.2
  region net NetJ3_5A: 62.4,84.8 58.6,84.8 58.6,83.9 62.4,83.9
  region net NetJ3_1A: 66.6,84.8 62.8,84.8 62.8,83.9 66.6,83.9
  region net NetJ3_2A: 70.8,84.8 67,84.8 67,83.9 70.8,83.9
  region net GND: 68,83.1 65.6,83.1 65.6,81.5 66,81.1 67.6,81.1 68,81.5
  region net NetJ4_5A: 81.5,84.8 77.7,84.8 77.7,83.9 81.5,83.9
  region net NetJ4_2A: 85.7,84.8 81.9,84.8 81.9,83.9 85.7,83.9
  region net NetJ4_1A: 89.9,84.8 86.1,84.8 86.1,83.9 89.9,83.9
  region net GND: 87.1,83.1 84.7,83.1 84.7,81.5 85.1,81.1 86.7,81.1 87.1,81.5
Bottom Layer:
  pour cut-out: -13.8,54.2 -10.2,54.2 -10.2,53.4 -13.8,53.4
  pour cut-out: -6.173,47.15 -6.173,45.95 -6.9,45.95 -6.9,47.15
  pour cut-out: -7.927,52.35 -7.927,47.95 -7.2,47.95 -7.2,52.35
  pour cut-out: -8.2,45.8 -8.6,46.7 -8.969,46.827 -17,46.827 -17,46.4 -17,46.1 -16.6,45.8 -16.6,45.073 -7.6,45.073 -7.6,45.8
  pour cut-out: 150.95,37.8 150.95,48.071 140.18,48.071 140.245,37.8
  region net 3V3_LDO: 137.167,31.904 137.171,31.9 139.2,31.9 139.6,31.5 139.6,29.651 139.207,29.814 138.117,30.903 137.167,30.903
  region net AGND: 146.105,40.184 145.105,40.184 145.105,39.642 144.619,39.156 143.393,39.156 142.9,38.663 142.9,38.2 143.5,37.6 147.7,37.6 148.3,38.2 148.3,38.746 147.891,39.156 146.528,39.156 146.105,39.578
  region net AGND: 137.498,47.906 137.498,46.906 137.362,46.77 137.362,44.627 138.412,44.627 139.662,45.877 140.124,45.877 140.124,48.198 138.79,48.198 138.498,47.906
  region net AGND: 134.77,48.293 133.026,46.548 133.026,45.175 130.551,42.7 129.6,42.7 129.6,44.421 134.098,48.919 134.098,48.964
  region net PGND: 123.925,22.4 130.552,29.027 135.231,29.027 135.231,27.227 129.025,21.021 129.025,20.4 123.925,20.4
  region net ENC1B: 93.075,17 93.075,14.3 92.125,14.3 92.125,17
  region net 3V3_LDO: 115.596,13.048 109.743,13.048 109.743,7.779 115.596,7.779
  region net 3V3_LDO: -6.9,48.75 -6.9,47.55 -6.3,47.55 -4.875,46.3 -3.925,46.3 -3.925,48.7 -4.875,48.7 -4.925,48.75
  region net 3V3_LDO: 158.6,36.7 158.6,32.5 160.4,32.5 160.7,32.8 160.7,36.4 160.4,36.7
  region net 3V3_LDO: 156.568,55.512 156.568,53.862 155.618,52.912 155.618,51.812 157.168,51.812 158.1,53.225 159.1,53.225 159.1,55.088 158.557,55.512
  region net ENC1A: 93.075,21.85 93.075,19.3 92.15,19.3 92.15,21.85
  region net GND: 51.025,20.5 51.025,17.6 52.6,17.6 52.9,17.9 52.9,20.2 52.6,20.5
  region net ENC2B: 50.375,22 50.375,19.5 49.425,19.5 49.425,22
  region net ENC2A: 50.375,18.6 50.375,16.1 49.425,16.1 49.425,18.6
  region net ENC2SW: 30.525,18.5 30.525,16 29.6,16 29.6,18.5
  region net 9V: 126.75,-7.175 126.75,-4.171 125.709,-3.13 121.579,-3.13 121.579,-6.9 121.854,-7.175
  region net 9V_IN: 159.9,20.375 159.9,25.475 154.8,25.475 153.341,26.934 153.341,30.054 152.333,30.054 151.579,29.3 148.354,29.3 148.354,29.301 148.354,28.501 150.046,28.501 154.2,24.347 154.2,22.1 155.925,20.375
  region net 9V_IN: 131.575,20.4 131.575,22.375 136.981,27.781 136.981,30.294 137.168,30.481 138.319,30.481 139.499,29.301 142.654,29.301 142.654,28.501 140.301,28.501 136.675,24.875 136.675,20.4
  region net NetC53_2: 120.591,43.82 120.604,43.806 120.604,41.2 117.425,41.2 117.425,43.82
  region net OUTR+: 148.354,27.501 148.354,28.301 149.68,28.301 150.007,28.012 150.007,27.5
  region net OUTL+: 142.654,27.501 142.654,28.301 141.327,28.301 141,28.012 141,27.5
  region net PGND: 146.675,13.875 146.675,17.1 144.025,17.1 144.025,13.775 144.8,13 145.8,13
  region net OUTL-: 144.654,26.801 143.854,26.801 143.854,25.075 144.382,25.075 144.654,25.346
  region net OUTR-: 146.354,26.801 147.154,26.801 147.154,25.075 146.625,25.075 146.354,25.346
  region net BAT_SOC: 103.5,-17 103.5,-12.95 102.6,-12.95 102.6,-17
  region net GND: 125.679,-2.4 123.235,-2.4 123.235,-0.845 124.079,0 124.779,0 125.679,-0.9
  region net VBAT: 126.951,-7.175 127.75,-7.175 127.75,-6.36 127.96,-6.15 128.515,-6.15 128.829,-5.836 128.829,-4.663 126.945,-4.663
GROUND (plane layer: these items are gaps in the copper):
  rectangle: -23.1,38.7 -17.575,61.6
  lines w0.254: 112.623,34.998 132.446,34.998 134.935,37.487 151.638,37.487 155.721,41.569 155.721,55.416 155.721,58.45 162.725,65.455 162.725,71.05 158.134,71.05 157.014,72.171 149.961,72.171 149.961,51.761 148.5,50.3 133,50.3 130.328,52.972 126.216,52.972 118.583,52.972 112.623,47.012 112.623,39.379 112.623,35.023 ; 125.1,17.632 125.1,29.499 139.3,29.499 142.964,29.499 142.964,32.191 148.044,32.191 148.044,29.41 151.828,29.41 151.828,30.253 166,30.253 166,7.629 135.103,7.629 135.103,14.246 128.486,14.246 125.1,17.632
POWER (plane layer: these items are gaps in the copper):
  rectangle: -23.1,38.7 -17.575,61.6
  lines w0.127: 133.176,53.401 133.626,52.95 ; 139.56,67.357 149.644,67.357 ; 155.448,58.804 155.473,58.804
  lines w0.254: 112.623,34.998 132.446,34.998 134.935,37.487 152.247,37.487 152.247,39.547 ; 112.623,35.023 112.623,39.379 112.623,47.012 119.012,53.401 133.176,53.401 ; 139.56,67.357 139.56,57.731 137.506,57.731 133.176,53.401 ; 149.644,67.357 149.644,58.804 155.448,58.804 ; 133.176,53.401 135.386,51.19 142.087,51.19 142.07,51.173 142.19,51.173 142.19,50.022 152.247,50.022 152.247,39.401 155.448,39.401 155.448,50.022 ; 155.448,50.022 155.448,58.804 ; 155.448,50.022 155.448,58.804

## Silkscreen, mask and mechanical layers (free items; w line width, h text height)
Bottom Overlay:
  drawing of 73 lines, arcs and shapes, not listed
  text "TSI/SAMP/SAMI 3.5_PRO" at 147.211,93.9 h4.5
  text "'.ModifiedDate'" at 126.187,90.43 h1.91
  text "FD1" at 133.782,81.073 h1.91
  text "SCK" at 72.727,73.7 h1
  text "SDA" at 75.492,73.7 h1
  text "DCS" at 125.777,68.23 h1
  text "xRESET" at 120.32,55.073 h1
  text "LCD_CLK" at 17.45,54.483 h1
  text "LCD_SDA" at 17.45,51.583 h1
  text "AIN0" at 14.06,44.403 h1.5 r90
  text "AIN4" at 16.651,44.403 h1.5 r90
  text "AIN6" at 19.243,44.403 h1.5 r90
  text "3.3V" at 21.834,44.403 h1.5 r90
  text "GND" at 24.426,44.403 h1.5 r90
  text "SDC_MISO" at -7.404,38.25 h1.5 r90
  text "SDC_SCK" at -4.504,38.25 h1.5 r90
  text "SDC_MOSI" at -1.504,38.25 h1.5 r90
  text "SDC_MCS" at 1.396,38.25 h1.5 r90
  text "R-" at 147.383,5.432 h2.5
  text "L+" at 141.897,5.419 h2.5
  text "L-" at 144.31,5.419 h2.5
  text "R+" at 150.495,5.419 h2.5
  text "-" at 133.007,3.674 h7
  text "+" at 128.867,3.07 h7
  text "FD2" at -10.833,-1.147 h1.91
  text "FD3" at 141.44,-18.18 h1.91
Bottom 3D Body:
  circle w0.5: c108.965,72.02 r1.333
  circle w0.5: c108.965,41.54 r1.333
  circle w0.5: c34.035,41.54 r1.333
  circle w0.5: c34.035,72.02 r1.333
  circle w0.5: c0,78 r1.25
  circle w0.5: c143,78 r1.25
  circle w0.5: c0,0 r1.25
  circle w0.5: c143,0 r1.25
  lines w0.1: 70.102,10.728 ccw(c70.356,10.728) 70.356,10.474 72.646,10.474 ccw(c72.646,10.728) 72.9,10.728 72.9,26.446 ccw(c72.646,26.446) 72.646,26.7 70.356,26.7 ccw(c70.356,26.446) 70.102,26.446 70.102,10.728
  lines w0.102: 18.725,-28.583 ccw(c18.725,-28.583) 18.725,-28.583
Board Shape:
  lines w0.1: -4.23,-22 cw(c-4.23,-20.73) -5.5,-20.73 -5.5,-9 ccw(c-9,-9) -9,-5.5 -21.73,-5.5 cw(c-21.73,-4.23) -23,-4.23 -23,82.23 cw(c-21.73,82.23) -21.73,83.5 -9,83.5 ccw(c-9,87) -5.5,87 -5.5,98.73 cw(c-4.23,98.73) -4.23,100 15.9,100 ccw(c15.9,101.27) 17.17,101.27 ; 124.561,-24.54 ccw(c124.561,-23.27) 125.831,-23.27 cw(c127.101,-23.269) 127.1,-22 147.23,-22 ccw(c147.23,-20.73) 148.5,-20.73 148.5,-9 cw(c152,-9) 152,-5.5 164.73,-5.5 ccw(c164.73,-4.23) 166,-4.23 ; 152,83.5 cw(c152,87) 148.5,87 148.5,98.891 ccw(c147.23,98.891) 147.23,100.161 127.101,100.161 cw(c127.101,101.431) 125.831,101.431 125.83,101.431 125.83,101.5 124.56,101.5 17.17,101.5 17.17,101.27 ; 17.17,101.27 17.17,101.27
  lines w0.102: 124.561,-24.54 36.63,-24.54 34.867,-24.54 ccw(c34.867,-25.913) 33.493,-25.913 18.725,-25.913 18.725,-25.557 ccw(c15.168,-25.557) 15.168,-22 -4.23,-22 ; 152,83.5 163.498,83.5 163.749,83.5 cw(c163.749,82.23) 165.019,82.23 165.019,60.744 ccw(c165.915,60.744) 165.281,60.11 165.561,59.928 165.736,59.752 cw(c165.099,59.115) 166,59.115 166,-4.23 ; -4.23,-22 ccw(c-4.23,-22) -4.23,-22 ; 166,-4.23 ccw(c166,-4.23) 166,-4.23
  lines w0.5: 35.253,44.461 ccw(c36.777,44.461) 36.777,42.937 106.297,42.937 ccw(c106.297,44.461) 107.821,44.461 107.821,49.253 112.354,53.218 ccw(c111.351,54.365) 112.875,54.382 112.819,59.262 ccw(c111.295,59.244) 112.298,60.391 107.821,64.307 107.821,69.099 ccw(c106.297,69.099) 106.297,70.623 36.777,70.623 ccw(c36.777,69.099) 35.253,69.099 35.253,44.461

## Text inside footprints (layer, text, board x,y; h text height)
DS1: Top Overlay "LCD DISPLAY" at 67.115,36.995 h1.52
J2: Mechanical 1 "PCB Edge" at 47.459,102.109 h0.76 r180; Bottom Assembly "PCB Edge" at 47.459,102.109 h0.76 r180
J3: Mechanical 1 "PCB Edge" at 62.448,102.059 h0.76 r180; Bottom Assembly "PCB Edge" at 62.448,102.059 h0.76 r180
J4: Mechanical 1 "PCB Edge" at 77.434,102.059 h0.76 r180; Bottom Assembly "PCB Edge" at 77.434,102.059 h0.76 r180
J5: Mechanical 1 "PCB Edge" at 92.417,102.109 h0.76 r180; Bottom Assembly "PCB Edge" at 92.417,102.109 h0.76 r180
J6: Bottom Assembly "Off PCB Edge" at 75.249,-25.879 h0.76
J7: Bottom Assembly "Off PCB Edge" at 91.467,-25.879 h0.76
J12: Mechanical 1 "PCB Edge" at 165.6,69.39 h0.76 r90; Bottom Assembly "PCB Edge" at 165.6,69.39 h0.76 r90
M1: Top Overlay "K" at 129.464,65.579 h1.5 r90
MK1: Top Overlay "+" at 75.388,22.447 h3
S1: Mechanical 1 "Off PCB Edge" at 104.438,-26.07 h0.76; Bottom Assembly "Board Edge" at 108.116,-24.247 h0.5
U10: Mechanical 1 "No Copper Region" at -19.595,61.199 h1.27 r90
VR1: Mechanical 1 "Board Edge" at 46.617,-24.071 h0.75 r180; Bottom Assembly "Board Edge" at 46.617,-24.071 h0.75 r180; Bottom Courtyard "Knob Outline" at 56.094,-41.063 h1.91